# EAGLE board LPC218devboard (EAGLE 7.7.0)
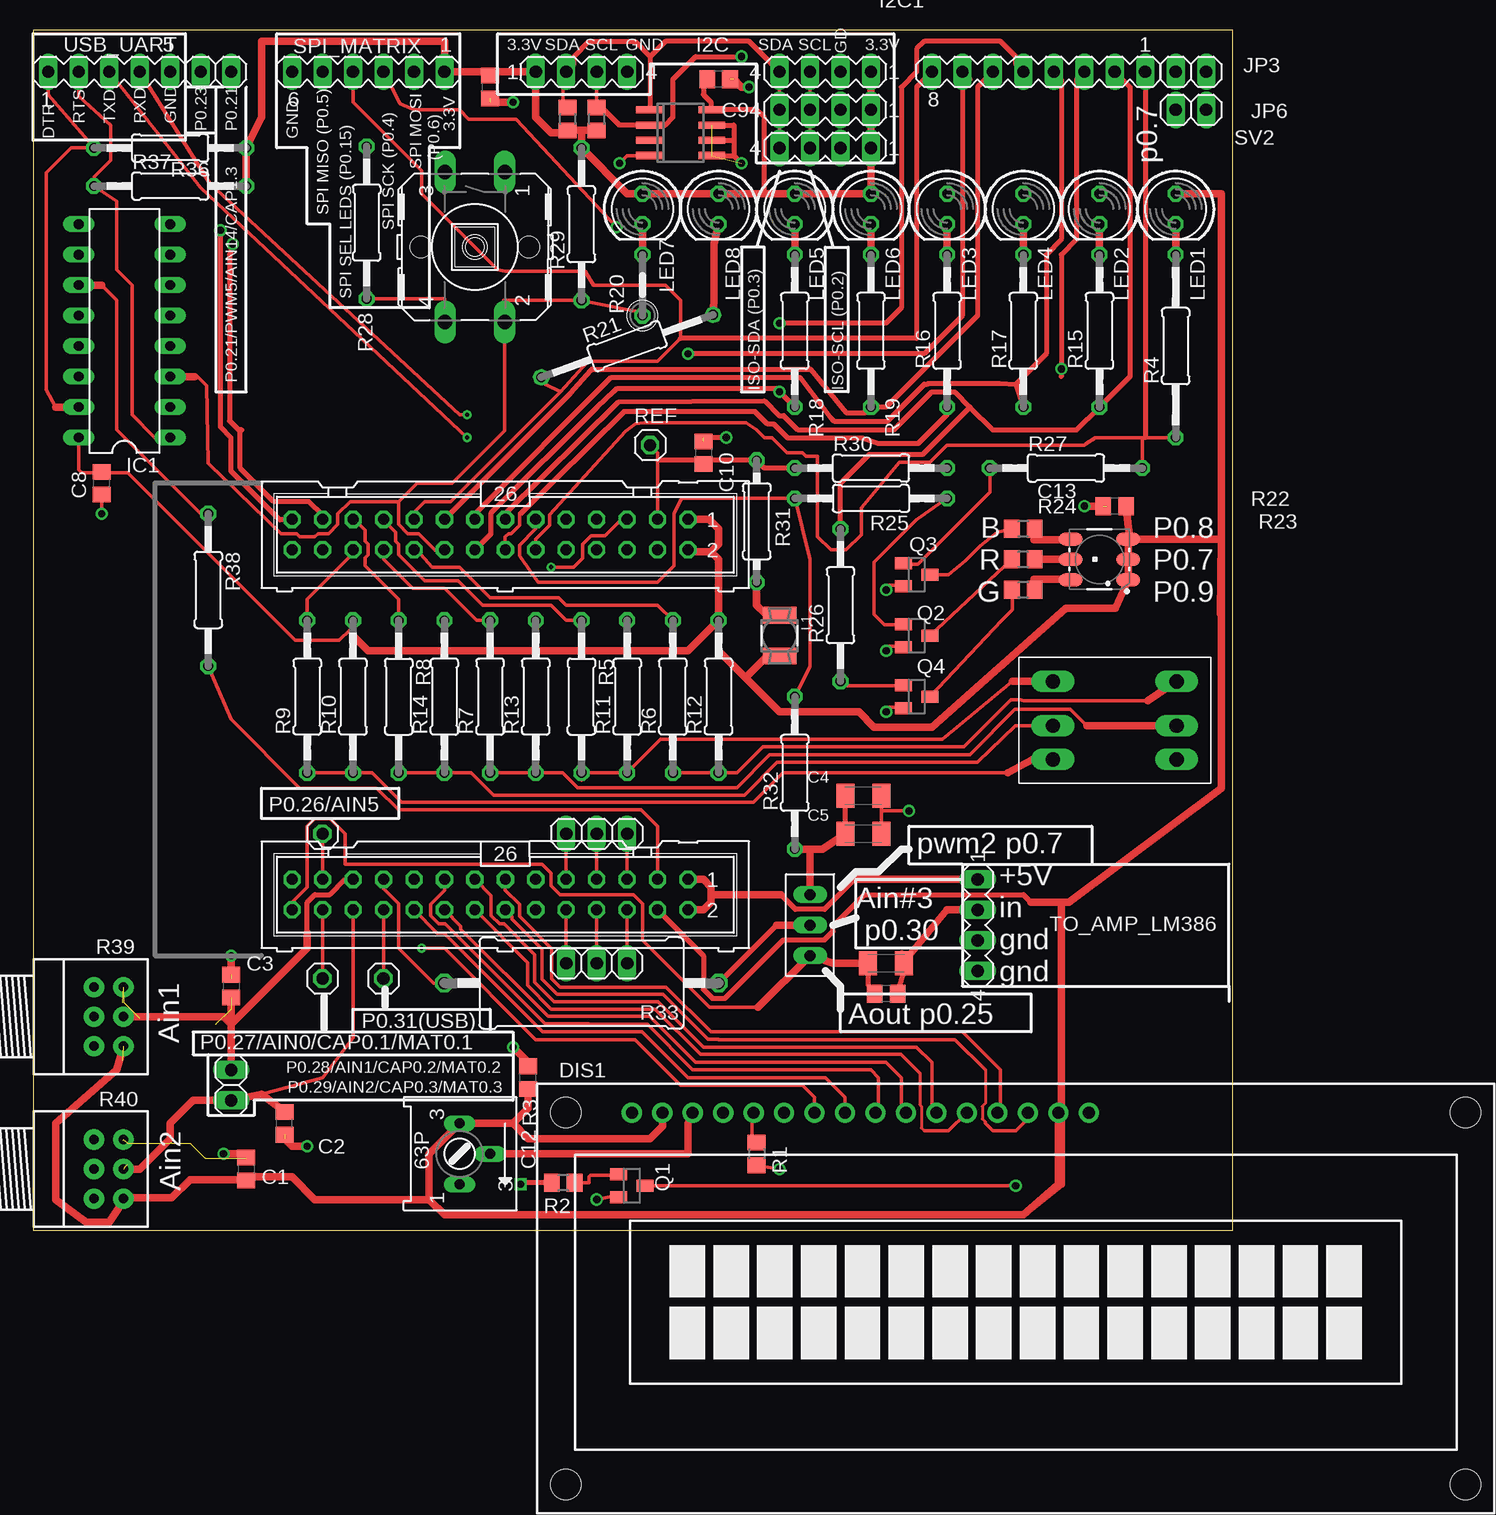
[diagram p0: board, top side]
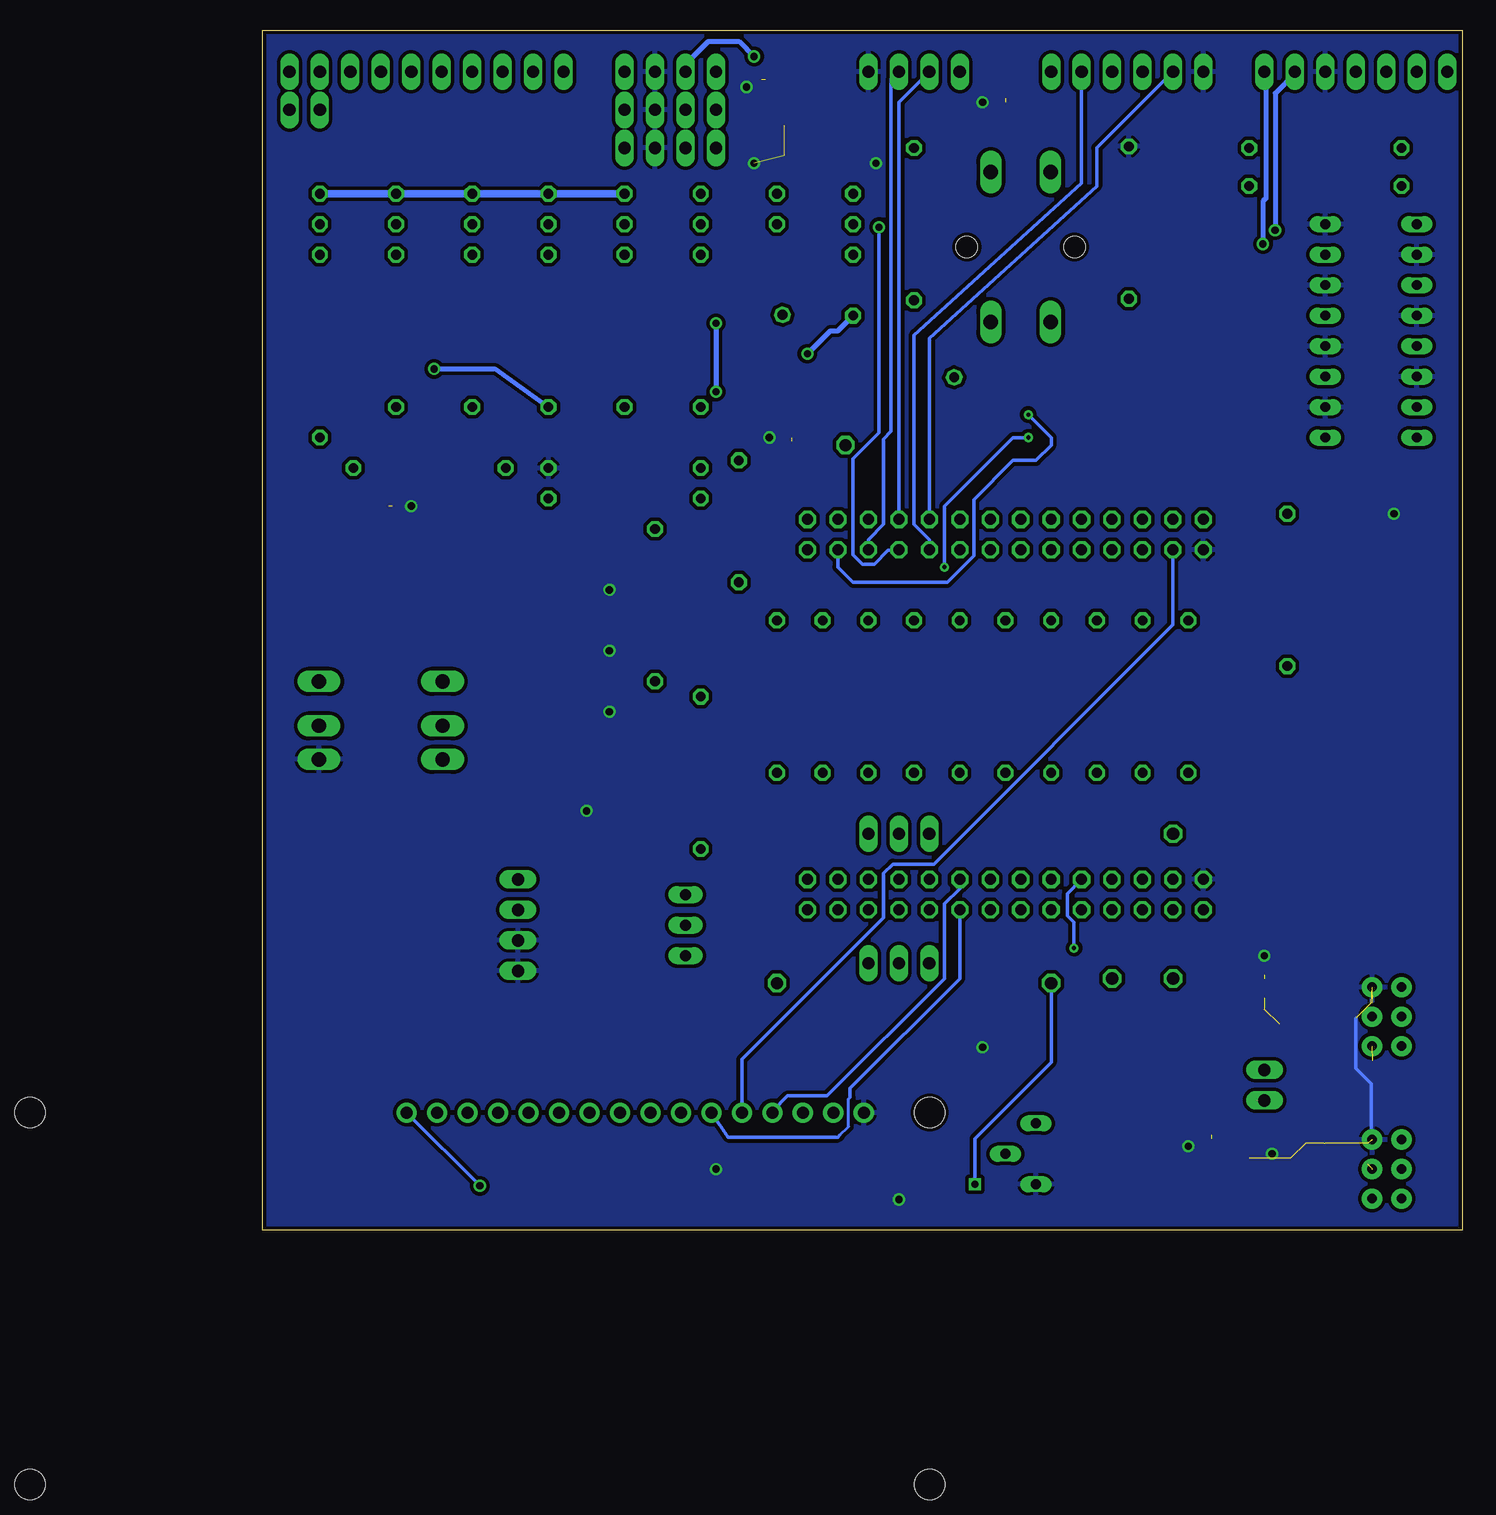
[diagram p1: board, bottom side, seen from below]

Size 100 x 100 mm. Coordinates in mm from the lower left corner, seen from the top.
Outline: 0,0 100,0 100,100 0,100 0,0
Copper layers (1*16): Top 0.035mm / dielectric 1.5mm / Bottom 0.035mm
Design rules "default *": minimum track width 12mil, minimum drill 24mil, track to track 12mil, track to pad 12mil, pad to pad 0.5mm, via to via 0.5mm, smd to smd 8mil, copper to edge 12mil, drill to drill 8mil, minimum pad ring 10mil, minimum via ring 8mil, stop-mask expansion 4mil, vias tented up to drill 0mil, thermal gap 10mil

## Footprints (pad centres in the part's own frame; a part is rotated, then mirrored left to right if it is on the bottom)
C0805 = smd 1.3 x 1.5: 1 -0.95,0; 2 0.95,0
C1206K = smd 1.5 x 2: 1 -1.5,0; 2 1.5,0
LED-TRICOLOR-5050 = smd 2 x 1.1: 1 -2.4,1.7; 2 -2.4,0; 3 -2.4,-1.7; 4 2.4,-1.7; 5 2.4,0; 6 2.4,1.7
TUXGR_16X2_R2 = drill 1 pad 1.676: 1 -32,15.5; 2 -29.46,15.5; 3 -26.92,15.5; 4 -24.38,15.5; 5 -21.84,15.5; 6 -19.3,15.5; 7 -16.76,15.5; 8 -14.22,15.5; 9 -11.68,15.5; 10 -9.14,15.5; 11 -6.6,15.5; 12 -4.06,15.5; 13 -1.52,15.5; 14 1.02,15.5; 15 3.56,15.5; 16 6.1,15.5 | hole 2.5: -37.5,-15.5; 37.5,-15.5; -37.5,15.5; 37.5,15.5
MA04-1 = drill 1.016 long: 1 -3.81,0; 2 -1.27,0; 3 1.27,0; 4 3.81,0
DIL16 = drill 0.813 long: 1 -8.89,-3.81; 2 -6.35,-3.81; 3 -3.81,-3.81; 4 -1.27,-3.81; 5 1.27,-3.81; 6 3.81,-3.81; 7 6.35,-3.81; 8 8.89,-3.81; 9 8.89,3.81; 10 6.35,3.81; 11 3.81,3.81; 12 1.27,3.81; 13 -1.27,3.81; 14 -3.81,3.81; 15 -6.35,3.81; 16 -8.89,3.81
SO8 = smd 0.6 x 2.2: 1 -1.905,-2.6; 2 -0.635,-2.6; 3 0.635,-2.6; 4 1.905,-2.6; 5 1.905,2.6; 6 0.635,2.6; 7 -0.635,2.6; 8 -1.905,2.6
1X02 = drill 1.016 long: 1 -1.27,0; 2 1.27,0
1X03 = drill 1.016 long: 1 -2.54,0; 2 0,0; 3 2.54,0
MS50 = smd 2.8 x 1.4: 1 0,-1.7; 2 0,1.7
LED5MM = drill 0.813 octagon: A -1.27,0; K 1.27,0
1X01 = drill 1.016 octagon: 1 0,0
SOT23 = smd 1 x 1.4: 1 -0.95,-1.1; 2 0.95,-1.1; 3 0,1.1
R0805 = smd 1.3 x 1.5: 1 -0.95,0; 2 0.95,0
S63P = drill 0.813 long: A 2.54,0; E -2.54,0; S 0,2.54
0207/15 = drill 0.813 octagon: 1 -7.62,0; 2 7.62,0
0207/12 = drill 0.813 octagon: 1 -6.35,0; 2 6.35,0
0207/5V = drill 0.813 octagon: 1 -2.54,0; 2 2.54,0
0207/10 = drill 0.813 octagon: 1 -5.08,0; 2 5.08,0
P0817/22 = drill 1.016 octagon: 1 -11.43,0; 2 11.43,0
RK097G = drill 0.8 pad 1.676: 1-1 -2.46,-1.27; 1-2 0,-1.27; 1-3 2.46,-1.27; 2-1 -2.46,1.19; 2-2 0,1.19; 2-3 2.46,1.19
B3F-40XX = drill 1.194 long: 1 -6.248,2.489; 2 6.248,2.489; 3 -6.248,-2.489; 4 6.248,-2.489 | hole 1.803: 0,-4.496; 0,4.496
MA06-1 = drill 1.016 long: 1 -6.35,0; 2 -3.81,0; 3 -1.27,0; 4 1.27,0; 5 3.81,0; 6 6.35,0
ML26 = drill 0.914 octagon: 1 -15.24,-1.27; 2 -15.24,1.27; 3 -12.7,-1.27; 4 -12.7,1.27; 5 -10.16,-1.27; 6 -10.16,1.27; 7 -7.62,-1.27; 8 -7.62,1.27; 9 -5.08,-1.27; 10 -5.08,1.27; 11 -2.54,-1.27; 12 -2.54,1.27; 13 0,-1.27; 14 0,1.27; 15 2.54,-1.27; 16 2.54,1.27; 17 5.08,-1.27; 18 5.08,1.27; 19 7.62,-1.27; 20 7.62,1.27; 21 10.16,-1.27; 22 10.16,1.27; 23 12.7,-1.27; 24 12.7,1.27; 25 15.24,-1.27; 26 15.24,1.27; 27 17.78,-1.27; 28 17.78,1.27
MA08-1 = drill 1.016 long: 1 -8.89,0; 2 -6.35,0; 3 -3.81,0; 4 -1.27,0; 5 1.27,0; 6 3.81,0; 7 6.35,0; 8 8.89,0
ALPS_SKQ_MDS_PTH = drill 1.2 long: 1 -5.15,2.54; 2 -5.15,-1.16; 3 -5.15,-3.96; 4 5.15,-3.96; 5 5.15,-1.16; 6 5.15,2.54
JP2_ORIG = drill 0.914 long: 1 -2.54,0; 2 0,0; 3 2.54,0
MA05-1 = drill 1.016 long: 1 -5.08,0; 2 -2.54,0; 3 0,0; 4 2.54,0; 5 5.08,0

## Placement (x,y rotation side)
C1  100n  [C0805]  17.78,5.08 270 top
C2  100n  [C0805]  20.95,8.89 90 top
C3  100n  [C0805]  16.51,20.32 270 top
C4  10u  [C1206K]  69.22,36.2 180 top
C5  10u  [C1206K]  69.22,33.02 180 top
C6  100n  [C0805]  71.12,19.68 180 top
C7  10u  [C1206K]  71.12,22.23 180 top
C8  100n  [C0805]  5.71,62.23 90 top
C9  100n  [C0805]  57.15,95.89 180 top
C10  100n  [C0805]  55.88,64.77 270 top
C11  100n  [C0805]  38.1,95.25 270 top
C12  100n  [C0805]  41.27,12.7 90 top
C13  100n  [C0805]  90.17,60.33 180 top
D1  [LED-TRICOLOR-5050]  88.9,55.88 180 top
DIS1  TUXGR_16X2_R2  [TUXGR_16X2_R2]  81.92,-5.71 0 top
I2C  [MA04-1]  45.72,96.52 0 top
I2C1  [MA04-1]  66.04,96.52 180 top
I2C2  [MA04-1]  66.04,93.34 180 top
I2C3  [MA04-1]  66.04,90.17 180 top
IC1  4503N  [DIL16]  7.62,74.93 90 top
IC2  LM75A  [SO8]  53.98,91.44 270 top
JP1  [1X02]  16.51,12.06 270 top
JP2  [1X02]  15.24,96.52 180 top
JP3  [1X02]  96.52,96.52 0 top
JP4  [1X03]  46.99,33.02 0 top
JP5  [1X03]  46.99,22.23 180 top
JP6  [1X02]  96.52,93.34 0 top
L1  [MS50]  62.23,49.53 180 top
LED1  [LED5MM]  95.25,85.09 270 top
LED2  [LED5MM]  88.9,85.09 270 top
LED3  [LED5MM]  76.2,85.09 270 top
LED4  [LED5MM]  82.55,85.09 270 top
LED5  [LED5MM]  63.5,85.09 270 top
LED6  [LED5MM]  69.85,85.09 270 top
LED7  [LED5MM]  50.8,85.09 270 top
LED8  [LED5MM]  57.15,85.09 270 top
P0.26/AIN5  [1X01]  24.13,33.02 0 top
P0.27/AIN0/CAP0.1/MAT0.1  [1X01]  24.13,20.95 0 top
P0.31(USB)  [1X01]  29.21,20.95 0 top
Q1  BC848ASMD  [SOT23]  49.91,3.68 270 top
Q2  BC848ASMD  [SOT23]  73.66,49.53 270 top
Q3  BC848ASMD  [SOT23]  73.66,54.61 270 top
Q4  BC848ASMD  [SOT23]  73.66,44.45 270 top
R1  3K  [R0805]  60.33,6.35 270 top
R2  3K  [R0805]  44.2,3.94 180 top
R3  [S63P]  35.56,6.35 270 top
R4  1K  [0207/15]  95.25,73.66 90 top
R5  270  [0207/12]  45.72,44.45 270 top
R6  270  [0207/12]  53.34,44.45 90 top
R7  270  [0207/12]  38.1,44.45 90 top
R8  270  [0207/12]  30.48,44.45 270 top
R9  270  [0207/12]  22.86,44.45 90 top
R10  10k  [0207/12]  26.67,44.45 90 top
R11  10k  [0207/12]  49.53,44.45 90 top
R12  10k  [0207/12]  57.15,44.45 90 top
R13  10k  [0207/12]  41.91,44.45 90 top
R14  10k  [0207/12]  34.29,44.45 90 top
R15  1K  [0207/12]  88.9,74.93 90 top
R16  1K  [0207/12]  76.2,74.93 90 top
R17  1K  [0207/12]  82.55,74.93 90 top
R18  1K  [0207/12]  63.5,74.93 90 top
R19  1K  [0207/12]  69.85,74.93 90 top
R20  1K  [0207/5V]  50.8,78.74 90 top
R21  1K  [0207/15]  49.53,73.66 20 top
R22  1K  [R0805]  82.55,55.88 180 top
R23  1K  [R0805]  82.55,53.34 180 top
R24  1K  [R0805]  82.55,58.42 180 top
R25  10k  [0207/12]  69.85,60.96 180 top
R26  10k  [0207/12]  67.31,52.07 90 top
R27  10k  [0207/12]  86.11,63.5 0 top
R28  270  [0207/12]  27.81,83.95 90 top
R29  10K  [0207/12]  45.72,83.82 90 top
R30  3K  [0207/12]  69.85,63.5 0 top
R31  1.5K  [0207/10]  60.33,59.05 270 top
R32  3K  [0207/12]  63.5,38.1 90 top
R33  180  [P0817/22]  45.72,20.57 180 top
R34  3K  [R0805]  44.58,92.58 90 top
R35  3K  [R0805]  46.99,92.58 90 top
R36  10k  [0207/12]  11.43,90.17 0 top
R37  10k  [0207/12]  11.43,87 0 top
R38  10k  [0207/12]  14.61,53.34 270 top
R39  [RK097G]  6.35,17.78 270 top
R40  [RK097G]  6.35,5.08 270 top
REF  [1X01]  51.44,65.41 0 top
S1  [B3F-40XX]  36.83,81.92 270 top
SPI_MATRIX  [MA06-1]  27.94,96.52 180 top
SV1  [ML26]  39.37,57.94 180 top
SV2  [MA08-1]  83.82,96.52 180 top
SW1  [ALPS_SKQ_MDS_PTH]  90.17,43.18 0 top
TO_AMP_LM386  [MA04-1]  78.74,25.4 270 top
U$1  LPC2148_BOT  [ML26]  39.37,27.94 180 top
U$2  JP2E_ORIGJP2_ORIG  [JP2_ORIG]  64.77,25.4 90 top
USB_UART  [MA05-1]  6.35,96.52 0 top

## Library data of the parts
C1-C13 R1 R2 R4-R38 = rcl
D1 = LED-RGB; PROD_ID: DIO-10298
DIS1 = display-lcd; OC_FARNELL: unknown; OC_NEWARK: unknown
I2C I2C1-I2C3 SPI_MATRIX SV2 TO_AMP_LM386 USB_UART = con-lstb; OC_FARNELL: unknown; OC_NEWARK: unknown
IC1 = 45xx
IC2 = LM75A
JP1-JP6 P0.26/AIN5 P0.27/AIN0/CAP0.1/MAT0.1 P0.31(USB) REF = pinhead
L1 = inductor-neosid; OC_FARNELL: unknown; OC_NEWARK: unknown
LED1-LED8 = led
Q1-Q4 = transistor-npn
R3 = pot
R39 R40 = poti_RK097G
S1 = switch-omron; MF: OMRON COMPONENTS USA; MPN: B3F-4000; OC_FARNELL: 176434; OC_NEWARK: 36K3105
SV1 U$1 = con_LPC2148
SW1 = ALPS_SKQ_MDS
U$2 = Switch Aliexpress 2

## Nets
+3V3: C1.2 C8.2 C9.2 C11.1 C12.1 C13.1 D1.1 D1.2 D1.3 DIS1.2 DIS1.15 I2C1.1 I2C2.1 I2C3.1 I2C.1 IC1.16 IC2.8 L1.2 LED1.A LED2.A LED3.A LED4.A LED5.A LED6.A LED7.A LED8.A R3.E R10.2 R11.2 R12.2 R13.2 R14.2 R29.2 R34.1 R35.1 R36.2 R37.2 R39.2-3 R40.2-3 SPI_MATRIX.1 SV1.1 SV1.2 U$1.4
+5V: TO_AMP_LM386.1 U$1.1 U$1.2
GND: C1.1 C2.1 C3.1 C4.1 C5.1 C8.1 C9.1 C10.1 C11.2 C13.2 DIS1.1 I2C1.2 I2C2.2 I2C3.2 I2C.4 IC1.2 IC1.4 IC1.6 IC1.8 IC1.10 IC1.12 IC1.14 IC2.4 IC2.5 IC2.6 IC2.7 Q1.2 Q2.2 Q3.2 Q4.2 R1.2 R3.A R28.2 R30.2 R39.2-1 R40.2-1 SPI_MATRIX.6 SV1.28 SW1.4 TO_AMP_LM386.3 TO_AMP_LM386.4 U$1.27 USB_UART.5
N$1: IC1.1 R37.1 USB_UART.2
N$2: DIS1.7 U$1.19
N$3: DIS1.8 U$1.20
N$4: DIS1.9 U$1.17
N$5: DIS1.10 U$1.18
N$6: DIS1.11 U$1.15
N$7: DIS1.12 U$1.16
N$8: DIS1.13 U$1.13
N$9: DIS1.14 U$1.14
N$10: R38.2 U$1.3
N$11: DIS1.4 U$1.11
N$12: DIS1.5 R1.1 SV1.26
N$13: DIS1.6 U$1.12
N$14: R2.2 R33.2 U$1.21
N$15: Q1.1 R2.1
N$16: DIS1.16 Q1.3
N$17: DIS1.3 R3.S
N$18: R9.2 SV1.24
N$19: R7.2 SV1.22
N$20: R6.2 SV1.20
N$21: R5.1 SV1.21
N$22: R8.1 SV1.23
N$23: R6.1 R12.1 SW1.6
N$24: R7.1 R13.1 SW1.5
N$25: R5.2 R11.1 SW1.1
N$26: R8.2 R14.1 SW1.2
N$27: R9.1 R10.1 SW1.3
N$28: LED1.K R4.2
N$29: LED2.K R15.2
N$30: R28.1 S1.4
N$31: R15.1 R26.2 SV1.13 SV2.2
N$33: R4.1 R27.2 SV1.12 SV2.1
N$34: Q3.3 R24.2
N$35: LED3.K R16.2
N$36: LED4.K R17.2
N$37: R16.1 SV1.14 SV2.3
N$38: R17.1 SV1.15 SV2.4
N$41: Q4.3 R23.2
N$42: LED5.K R18.2
N$43: LED6.K R19.2
N$46: R19.1 SV1.17 SV2.6
N$47: R18.1 SV1.16 SV2.5
N$48: Q2.3 R22.2
N$49: LED7.K R20.2
N$50: LED8.K R21.2
N$52: L1.1 R31.2
N$54: IC1.3 R20.1 R29.1 S1.2 SV1.18 SV2.7
N$55: Q2.1 R25.1
N$56: D1.5 R22.1
N$57: D1.6 R23.1
N$58: D1.4 R24.1
N$59: R25.2 R32.2 SV1.11
N$60: Q3.1 R27.1
N$61: Q4.1 R26.1
N$62: SV1.4 USB_UART.4
N$63: SV1.5 USB_UART.3
N$66: C3.2 JP1.1 R39.2-2 U$1.23
N$67: R33.1 U$2.2
N$68: C2.2 JP1.2 R40.2-2 U$1.24
N$69: C6.1 C7.1 TO_AMP_LM386.2
N$70: C4.2 C5.2 R32.1 U$2.3
N$71: IC1.11 R38.1
N$72: C6.2 C7.2 U$1.28 U$2.1
N$73: IC1.15 R36.1 USB_UART.1
N$74: C10.2 R30.1 R31.1 REF.1 SV1.3
N$75: JP4.1 U$1.9
N$76: JP4.2 U$1.7
N$77: JP4.3 U$1.5
N$78: JP5.3 U$1.10
N$79: JP5.2 U$1.8
N$80: JP5.1 U$1.6
N$81: P0.27/AIN0/CAP0.1/MAT0.1.1 U$1.26
N$82: P0.31(USB).1 U$1.22
N$83: P0.26/AIN5.1 U$1.25
P0.21: JP2.1 SV1.25
P0.23: JP2.2 SV1.27
SCL: I2C1.3 I2C2.3 I2C3.3 I2C.3 IC2.2 R35.2 SV1.6
SDA: I2C1.4 I2C2.4 I2C3.4 I2C.2 IC2.1 R34.2 SV1.7
SPI_MISO: SPI_MATRIX.5 SV1.9
SPI_MOSI: SPI_MATRIX.2 SV1.10
SPI_SCK: SPI_MATRIX.3 SV1.8
SPI_SEL: R21.1 SPI_MATRIX.4 SV1.19 SV2.8

## Tracks (layer width: path | path; a pad name or v marks a point on that pad's centre or on a via)
+3V3  (1 unrouted)
  Top 0.305: 56.52,93.34 56.26,93.34 | 91.31,55.88 D1.2 | 99.06,57.58 98.81,51.31 99.06,51.31 | DIS1.15 | IC1.16 3.81,63.37 4.06,63.12 5.71,63.12 C8.2 5.84,63.12 7.87,63.12 21.84,49.15 25.53,49.15 26.42,50.04 26.67,50.04 | 45.85,91.63 45.85,91.69 45.72,91.44 | 17.78,4.19 C1.2 | 7.62,2.67 R40.2-3 7.49,2.67
  Top 0.406: 83.2,27.3 82.57,27.94 69.32,27.94 66.7,25.32 66.7,24.89 65.99,24.18 62.55,24.18 57.68,19.3 56.62,19.3 55.88,20.05 55.88,22.86 U$1.4 | C9.2 55.88,95.25 55.88,94.61 56.52,93.98 56.52,93.34 IC2.8 60.33,93.34 60.96,92.71 60.96,86.36
  Top 0.61: R10.2 26.67,50.04 26.67,49.53 27.94,48.26 34.29,48.26 | 34.29,48.26 41.91,48.26 | 41.91,48.26 49.53,48.26 | 49.53,48.26 54.61,48.26 R12.2 | R11.2 49.53,48.26 | R13.2 41.91,48.26 | R14.2 34.29,48.26 | 45.72,91.44 R29.2 49.53,86.36 LED7.A LED8.A 60.96,86.36 LED5.A LED6.A I2C3.1 I2C2.1 I2C1.1 | R35.1 45.85,91.63 R34.1 44.38,91.44 43.18,91.44 41.91,92.71 I2C.1 38.1,96.52 | 91.44,57.58 D1.3 D1.2 D1.1 90.21,51.82 86.11,51.82 74.93,41.91 70.1,41.91 68.83,43.18 62.23,43.18 59.37,46.04 | 91.44,57.58 99.06,57.58 | 99.06,57.58 98.98,51.36 | LED1.A 99.06,86.36 99.06,57.58 | 99.06,57.58 99.06,51.31 99.06,36.83 86.36,27.3 85.72,27.3 | 85.72,27.3 85.72,3.81 82.55,1.27 | 82.55,1.27 85.47,3.81 DIS1.15 | 82.55,1.27 34.29,1.27 33.02,2.54 | 33.02,2.54 33.02,6.35 R3.E 40.01,8.89 | SV1.1 56.36,59.21 57.15,58.42 57.15,57.15 56.52,56.52 | 56.52,56.52 54.77,56.52 SV1.2 | R12.2 57.15,55.88 56.52,56.52 | 38.1,96.52 SPI_MATRIX.1 34.29,99.06 19.05,99.06 19.05,92.71 R36.2 R37.2 | DIS1.2 52.45,8.64 51.44,7.62 41.27,7.62 40.01,8.89 | 83.2,27.3 85.72,27.3 | R12.2 57.15,48.26 59.37,46.04 | 17.78,4.19 13.08,4.19 11.56,2.67 7.62,2.67 | 33.02,2.54 23.5,2.54 21.59,4.45 17.78,4.45 C1.2 | R40.2-3 7.62,2.54 6.35,0.64 4.45,0.64 1.91,2.54 1.91,8.89 6.99,13.34 R39.2-3 | L1.2 61.16,47.83 59.37,46.04 | C11.1 38.1,96.52 | C12.1 41.27,10.16 40.01,8.89 | C13.1 91.44,57.58
  Bottom 0.61: LED1.A LED2.A LED4.A LED6.A LED3.A
+5V
  Top 0.406: 68.47,29.21 65.99,26.72 63.55,26.72 62.34,27.94
  Top 0.61: U$1.2 55.88,26.67 56.52,27.3 56.52,27.94 | 56.52,27.94 56.52,28.57 55.88,29.21 U$1.1 | TO_AMP_LM386.1 68.47,29.21 | 62.34,27.94 56.52,27.94
GND  (via drill 0.6)  (21 unrouted)
  Top 0.305: 70.74,34.92 70.74,33.66 C5.1 | 70.74,34.92 70.74,36.2 C4.1 | v46.99,2.54 48.26,2.79 48.77,2.79 Q1.2 | v71.12,43.18 71.12,43.43 71.25,43.56 72.52,43.56 Q4.2 | v71.12,48.26 71.12,48.51 71.25,48.64 72.52,48.64 Q2.2 | v71.12,53.34 71.12,53.59 71.25,53.72 72.52,53.72 Q3.2 | v62.23,5.08 R1.2 | v5.71,59.69 C8.1 | IC2.4 49.53,89.53 v48.9,88.9 | v73.03,34.92 70.74,34.92 | 17.78,5.97 C1.1
  Top 0.406: v57.78,66.04 55.88,66.04
  Top 0.61: v59.69,95.25 59.05,95.25 58.42,95.89 | v40.01,93.98 38.1,93.98 | v40.01,15.24 41.27,13.97 | v87.63,60.33 89.53,60.33 | v16.51,22.86 16.51,20.95 | v22.86,6.99 21.59,6.99 20.95,7.62 | v15.88,6.35 17.78,6.35
  Bottom 0.305: 8.89,17.65 8.89,13.46 7.62,12.19 7.62,7.62 R40.2-1
  other vias: 59.05,88.9
  pour Bottom: -0.13,101.35 100.08,101.47 100.33,0 -0.64,-0.64
N$1
  Top 0.305: R37.1 5.59,87.12 | USB_UART.2 3.81,94.49 6.48,92.08 6.48,89.15 5.08,87.76 R37.1 | IC1.1 10.16,66.04 8.26,67.94 8.26,78.74 6.99,80.01 6.99,85.72 R37.1
N$2  (via drill 0.35)
  Top 0.305: DIS1.7 65.16,11.04 64.14,12.06 53.98,12.06 50.16,15.88 41.91,15.88 34.29,23.5 v32.38,23.5
  Bottom 0.305: v32.38,23.5 32.38,25.65 32.92,26.19 32.92,28.04 U$1.19
N$3
  Top 0.305: DIS1.8 67.69,11.04 66.04,12.7 54.61,12.7 50.77,16.54 42.47,16.54 34.27,24.74 33.68,24.74 U$1.20
N$4
  Top 0.305: U$1.17 34.29,28.32 33.12,27.15 33.12,26.19 33.81,25.5 34.37,25.5 42.67,17.2 46.3,17.2 46.35,17.14 51.21,17.14 54.99,13.36 55.85,13.36 55.88,13.34 69.85,13.34 70.48,12.7 70.48,10.04 DIS1.9
N$5
  Top 0.305: U$1.18 35.66,25.3 35.66,25.07 42.93,17.8 51.41,17.8 55.24,13.97 71.12,13.97 72.39,12.7 72.39,10.17 DIS1.10
N$6
  Top 0.305: DIS1.11 74.93,10.17 74.93,13.97 73.66,15.24 55.88,15.24 52.09,19.02 43.81,19.02 43.44,19.02 41.82,20.64 41.82,22.95 39.27,25.5 38.89,25.5 38.2,26.19 38.2,27.84 U$1.15
N$7
  Top 0.254: 73.91,13.08 73.91,10.44 74.05,10.31 74.05,8.51 74.3,8.26
  Top 0.305: U$1.16 41.21,22.29 41.21,20.38 43.18,18.41 43.19,18.41 | 43.19,18.41 | 43.19,18.41 51.84,18.41 55.63,14.63 72.36,14.63 73.91,13.08 | 74.3,8.26 76.33,8.26 DIS1.12
N$8
  Top 0.305: U$1.13 39.37,28.32 40.54,27.15 40.54,26.14 43.23,23.44 43.23,20.96 43.95,20.24 52.78,20.24 56.52,16.51 77.47,16.51 80.64,13.34 80.64,10.04 DIS1.13
N$9
  Top 0.254: 79.38,13.34 79.38,10.56 79.12,10.31 79.12,9.26 79.38,9.01 79.38,8.89
  Top 0.305: DIS1.14 82.94,9.28 81.92,8.26 80.01,8.26 79.38,8.89 | U$1.14 39.93,26.11 39.93,25.88 42.43,23.38 42.43,20.89 43.69,19.63 52.53,19.63 56.26,15.9 57.12,15.9 57.15,15.88 76.83,15.88 79.38,13.34
N$10
  Top 0.305: R38.2 16.51,42.55 22.23,36.83 28.66,36.83 30.46,35.03 50.7,35.03 52.07,33.66 U$1.3
N$11
  Bottom 0.305: U$1.11 41.91,28.45 43.18,27.18 43.18,20.95 52.96,11.18 56.26,11.18 57.53,9.91 DIS1.4
N$12
  Top 0.305: R1.1 59.94,7.62 59.94,9.65 DIS1.5
  Bottom 0.305: SV1.26 24.13,50.42 44.07,30.48 47.5,30.48 48.26,29.72 48.26,26.04 60.07,14.22 60.07,9.91 DIS1.5
N$13
  Bottom 0.254: 51.93,7.88 51.19,8.62 51.19,10.92 51.05,11.05
  Bottom 0.305: U$1.12 41.91,20.95 51.05,11.81 51.05,11.05 | DIS1.6 61.21,7.75 52.06,7.75 51.93,7.88
N$14  (via drill 0.6)
  Top 0.305: U$1.21 29.21,28.45 30.48,27.18 30.48,23.5 33.4,20.57 R33.2
  Top 0.406: R2.2 40.64,3.94 v40.64,3.81
  Bottom 0.305: R33.2 34.29,13.97 40.64,7.62 v40.64,3.81
N$15
  Top 0.305: Q1.1 48.77,4.57 46.48,4.57 46.35,4.45 46.35,3.94 R2.1
N$16  (via drill 0.61)
  Top 0.305: v81.92,3.68 Q1.3
  Bottom 0.305: v81.92,3.68 DIS1.16
N$17
  Top 0.61: R3.S 54.61,6.35 54.61,8.9 DIS1.3
N$18
  Top 0.305: R9.2 22.86,52.58 26.67,56.39 SV1.24
N$19
  Top 0.305: R7.2 36.96,50.8 34.29,53.47 31.62,53.47 29.21,55.88 SV1.22
N$20
  Top 0.305: R6.2 52.07,52.07 44.45,52.07 43.81,52.7 38.1,52.7 35.56,55.24 33.27,55.24 32,56.64 31.75,56.64 SV1.20
N$21
  Top 0.305: R5.1 44.45,50.8 43.18,52.07 37.47,52.07 35.43,54.1 32.64,54.1 30.48,56.26 30.48,57.15 30.23,57.4 30.23,58.17 29.21,59.18 SV1.21
N$22
  Top 0.305: R8.1 30.48,52.58 27.69,55.37 27.69,56.01 27.94,56.26 27.94,57.15 27.69,57.4 27.69,58.29 26.67,59.31 SV1.23
N$23
  Top 0.305: R6.1 R12.1 58.67,38.1 60.83,40.26 77.6,40.26 81.53,44.2 82.33,44.2 82.54,44.11 92.95,44.11
  Top 0.61: 92.95,44.11 SW1.6
N$24
  Top 0.305: 87.84,42.02 86.48,43.38 81.86,43.38 78.11,39.62 61.38,39.62 58.67,36.85 45.38,36.85 44.14,38.1 R13.1 R7.1
  Top 0.61: SW1.5 87.84,42.02
N$25
  Top 0.305: 81.66,45.72 75.82,40.89 52.32,40.89 R11.1 46.35,38.1 46.04,37.78 | 46.04,37.78 45.72,37.47 | 46.04,37.78 R5.2
  Top 0.61: SW1.1 81.66,45.72
N$26
  Top 0.305: R8.2 R14.1 36.52,38.1 38.37,36.25 59.31,36.25 62.02,38.99 78.74,38.99 81.88,42.01 83.26,42.01 SW1.2
N$27
  Top 0.305: SW1.3 83.33,39.22 | 81.28,38.1 62.53,38.1 60.07,35.64 30.71,35.64 28.25,38.1 R10.1 R9.1
  Top 0.61: 83.33,39.22 81.28,38.1
N$28
  Top 0.61: LED1.K R4.2
N$29
  Top 0.61: LED2.K R15.2
N$30
  Top 0.305: R28.1 34.29,77.6 S1.4
N$31
  Top 0.406: SV1.13 39.37,59.69 48.82,69.01 60.96,69.09 62.18,67.87 62.56,67.87 63.73,66.7 71.78,66.7 74.93,69.85 76.83,69.85 78.11,68.58 | 78.11,68.58 80.01,66.67 87,66.67 R15.1 91.44,71.12 91.44,95.25 SV2.2 | R26.2 67.31,62.23 69.72,64.64 74.17,64.64 78.11,68.58
N$33
  Top 0.305: 92.46,66.04 R27.2 | R4.1 92.71,66.04 92.46,66.04 | 92.46,66.04 88.56,66.04 87.78,65.51 87.63,65.41 76.2,65.41 74.78,63.98 72.24,63.98 69.06,60.17 69.06,57.96 67.77,56.67 66.52,56.67 65.41,57.78 65.41,64.46 64.45,64.46 64.14,64.77 62.87,64.77 61.59,66.04 60.96,66.04 60.33,66.67 59.43,67.26 50.93,67.26 50.22,67.18 49.4,66.55 43.08,59.59 43.08,58.73 41.91,57.56 SV1.12
  Top 0.406: SV2.1 92.71,66.04
  Bottom 0.305: 41.91,56.64 SV1.12
N$34
  Top 0.305: Q3.3 76.33,54.61 77.72,55.75 78.99,57.02 80.39,58.17 81.66,58.42 R24.2
N$35
  Top 0.61: LED3.K R16.2
N$36
  Top 0.61: LED4.K R17.2
N$37  (via drill 0.6)
  Top 0.305: SV1.14 39.37,57.78 39.63,58.04 39.85,58.04 40.54,58.73 40.54,59.59 40.64,59.69
  Top 0.406: R16.1 76.2,67.94 73.79,65.53 70.47,65.53 69.14,65.99 62.92,65.99 61.75,67.16 61.24,67.16 60.2,68.2 49.25,68.2 40.64,59.69 | 85.72,71.12 v85.72,71.75 85.72,81.28 87,82.55 87,95.89 SV2.3
  Bottom 0.406: R16.1 80.64,71.75 v85.72,71.75
N$38
  Top 0.406: SV1.15 36.83,59.69 48.16,71.02 63.98,71.02 65.94,68.43 66.57,67.61 66.78,67.41 71.22,67.41 74.3,70.48 74.56,70.48 74.64,70.56 80.57,70.56 81.92,70.48 | 81.92,70.48 R17.1 | SV2.4 85.72,95.89 85.72,82.55 84.45,81.28 84.45,73.03 81.92,70.48
N$40
  Top 0.406: 56.52,92.08 58.42,92.08 58.42,90.81 | 58.42,90.81 58.42,89.53 | 58.42,89.53 59.05,88.9 | 56.52,90.81 58.42,90.81 | 56.52,89.53 58.42,89.53
N$41
  Top 0.305: Q4.3 80.77,50.8 81.66,51.69 81.66,53.34 R23.2
N$42
  Top 0.61: LED5.K R18.2
N$43
  Top 0.61: LED6.K R19.2
N$46
  Top 0.406: SV1.17 44.83,69.75 46.52,71.65 46.59,71.73 64.8,71.73 67.77,68.12 69.39,68.12 R19.1 71.12,68.58 78.74,76.2 78.74,95.25 SV2.6
N$47  (via drill 0.6)
  Top 0.406: SV1.16 38.15,57.99 38.15,59.72 47.02,68.58 48.39,69.85 48.64,70.1 61.98,70.1 v62.23,69.85 R18.1 | SV2.5 81.92,97.16 81.92,97.79 80.64,99.06 74.3,99.06 73.66,98.42 73.66,96.52 72.39,95.25 72.39,76.83 71.12,75.56 v62.23,75.56
  Bottom 0.406: v62.23,75.56 v62.23,69.85
N$48
  Top 0.305: R22.2 Q2.3
N$49
  Top 0.61: LED7.K R20.2
N$50
  Top 0.61: LED8.K 56.77,82.17 56.77,77.47 R21.2
N$52
  Top 0.61: R31.2 60.33,52.07 60.96,51.44 62.23,51.44 L1.1
N$54  (via drill 0.6)
  Top 0.305: R20.1 51.05,76.58 50.16,76.58 46.23,77.34 R29.1 39.37,77.47 S1.2 | IC1.3 11.94,71.25 | 39.24,77.47 S1.2 | SV1.18 34.29,56.64 33.53,56.64 32.13,58.04 31.24,58.04 30.48,58.8 30.48,60.71 | S1.2 39.32,66.62 34.92,62.23 32,62.23 30.48,60.71 | 13.46,71.12 13.72,71.12 14.48,70.36 14.61,63.88 20.7,58.04 21.97,58.04 22.23,57.78 23.5,57.78 23.75,58.04 24.64,58.04 25.4,58.8 25.4,59.69 26.42,60.71 30.48,60.71
  Top 0.406: v54.61,73.03 74.3,73.03 77.47,76.2 77.47,95.25 78.11,95.89 SV2.7
  Top 0.61: 13.46,71.12 IC1.3
  Bottom 0.406: R20.1 52.07,74.93 52.7,74.93 v54.61,73.03
N$55
  Top 0.305: R25.1 73.66,59.18 70.1,55.63 70.1,51.31 70.99,50.42 72.52,50.42 Q2.1
N$56
  Top 0.61: D1.5 R22.1
N$57
  Top 0.305: 83.44,54.23 83.44,53.34 R23.1 | 86.49,54.23 D1.6
  Top 0.61: 86.49,54.23 83.44,54.23
N$58
  Top 0.305: 83.44,57.53 83.44,58.42 R24.1 | 86.49,57.53 D1.4
  Top 0.61: 86.49,57.53 83.44,57.53
N$59
  Top 0.305: R32.2 64.77,46.99 64.77,55.88 R25.2 54.07,60.96 53.44,59.69 53.44,55.35 52.07,53.98 42.11,53.98 40.54,56.19 40.54,57.05 41.91,58.42 SV1.11
N$60
  Top 0.305: R27.1 79.76,61.47 73.79,55.5 72.64,55.5 Q3.1
N$61
  Top 0.305: R26.1 67.69,45.34 72.52,45.34 Q4.1
N$62  (via drill 0.35)
  Top 0.305: v36.2,67.94 35.56,67.94 14.73,87.25 USB_UART.4
  Bottom 0.305: SV1.4 52.07,55.24 50.8,53.98 42.95,53.98 40.74,56.19 40.74,60.86 37.47,64.14 35.56,64.14 34.29,65.41 34.29,66.04 v36.2,67.94
N$63  (via drill 0.35)
  Top 0.305: SV1.5 49.05,59.21 47.68,57.84 46.51,57.84 45.82,57.15 45.82,55.98 45.06,55.22 43.2,55.22 v43.18,55.24 | USB_UART.3 13.97,86.87 v36.2,66.04
  Bottom 0.305: USB_UART.3 6.35,96.14 | v43.18,55.24 43.18,60.33 37.47,66.04 v36.2,66.04
N$66  (2 unrouted)
  Top 0.406: U$1.23 26.04,29.21 24.77,27.94 23.5,27.94 22.86,27.3 22.86,24.77
  Top 0.61: JP1.1 16.51,17.14 | R39.2-2 15.88,17.78 16.19,17.46 16.51,17.14 | 22.86,24.77 22.86,23.5 16.51,17.14 | C3.2 16.51,17.14
N$67
  Top 0.406: 61.98,25.4 R33.1
  Top 0.61: U$2.2 61.98,25.4
N$68  (3 unrouted)
  Top 0.305: U$1.24 26.67,16 24.13,12.7 19.08,11.32 17.14,10.79 JP1.2 | 7.62,5.08 R40.2-2
  Top 0.61: JP1.2 19.08,11.32 C2.2 | 7.62,5.08 8.89,5.08 11.43,7.62 11.43,8.89 13.34,10.79 17.14,10.79
N$69
  Top 0.406: C6.1 72.7,21.91 73.03,22.86 72.39,23.09 C7.1
  Top 0.61: TO_AMP_LM386.2 76.2,26.67 73.03,22.86
N$70
  Top 0.406: C5.2 C4.2
  Top 0.61: 64.77,31.75 65.81,31.75 C5.2 | U$2.3 64.77,31.75 | R32.1 64.77,31.75
N$71
  Top 0.305: R38.1 13.97,59.69 6.99,66.67 6.99,77.47 5.71,78.74
  Top 0.61: 5.71,78.74 IC1.11
N$72
  Top 0.305: 60.45,18.54 56.39,18.54 50.8,24.13 50.8,27.18 50.04,27.94 43.94,27.94 43.18,28.7 43.18,29.72 42.42,30.48 26.04,30.48 26.04,33.02 24.77,34.29 23.5,34.29 22.86,33.66 22.86,28.57 21.59,27.3 U$1.28
  Top 0.406: C7.2 69.62,20.41 C6.2
  Top 0.61: C7.2 66.67,22.23 U$2.1 60.45,18.54
N$73
  Top 0.305: USB_UART.1 1.27,94.61 R36.1 3.17,90.17 1.09,88.09 1.09,70.03 1.91,68.58
  Top 0.61: 1.91,68.58 IC1.15
N$74
  Top 0.305: SV1.3 52.07,64.14 52.07,64.77 REF.1
  Top 0.406: R30.1 60.96,63.5 R31.1 55.88,64.14 | 55.88,64.14 52.07,64.14 | 55.88,64.14 C10.2
N$75
  Top 0.305: JP4.1 U$1.9
N$76
  Top 0.305: JP4.2 U$1.7
N$77
  Top 0.305: JP4.3 U$1.5
N$78
  Top 0.305: JP5.3 U$1.10
N$79
  Top 0.305: JP5.2 U$1.8
N$80
  Top 0.305: JP5.1 U$1.6
N$81
  Top 0.305: U$1.26 P0.27/AIN0/CAP0.1/MAT0.1.1
N$82
  Top 0.305: P0.31(USB).1 U$1.22
N$83
  Top 0.305: U$1.25 P0.26/AIN5.1
P0.21  (via drill 0.6)
  Top 0.406: SV1.25 24.13,59.56 22.99,60.71 20.07,60.71 17.27,63.5 17.27,66.55 17.4,66.67 17.14,66.67 16.38,67.44 16.38,81.28 v16.64,82.17
  Bottom 0.406: v16.64,82.17 16.64,85.72 16.38,85.98 16.38,96.39 JP2.1
P0.23  (via drill 0.6)
  Top 0.406: v15.62,83.31 15.62,66.93 16.51,66.04 16.51,63.25 20.57,59.18 21.59,59.18 SV1.27
  Bottom 0.406: v15.62,83.31 15.62,94.74 13.97,96.39 JP2.2
SCL  (via drill 0.6)
  Top 0.305: I2C3.3 I2C2.3 I2C1.3 | I2C.3 46.99,93.98
  Top 0.406: R35.2 46.99,93.98 48.9,92.08 IC2.2 52.7,92.08 53.34,92.71 53.34,95.89 55.24,97.79 v59.05,97.79
  Bottom 0.305: SV1.6 49.53,57.53 48.26,58.8 48.26,65.91 47.62,66.55 47.62,95.89 I2C.3
  Bottom 0.406: v59.05,97.79 60.33,99.06 62.87,99.06 64.77,97.16 I2C1.3
SDA
  Top 0.305: I2C3.4 I2C2.4 I2C1.4 62.1,96.52 | R34.2 44.58,93.47 44.2,93.47 44.2,96.27 I2C.2 44.45,96.9
  Top 0.406: IC2.1 51.44,93.34 51.44,97.79 | 51.44,97.79 50.16,99.06 46.35,99.06 45.09,97.79 45.09,97.16 I2C.2 | 51.44,97.79 52.7,99.06 59.69,99.06 I2C1.4
  Bottom 0.305: SV1.7 46.99,93.98 I2C.2
SPI_MISO
  Bottom 0.305: SV1.9 44.45,74.3 30.48,87 30.48,90.17 SPI_MATRIX.5
SPI_MOSI
  Bottom 0.305: SV1.10 44.45,57.53 45.72,58.8 45.72,74.55 31.75,87.25 SPI_MATRIX.2
SPI_SCK  (via drill 0.61)
  Top 0.305: v48.64,83.57 40.26,92.58 36.32,92.58 35.56,93.34 31.75,93.34 30.61,93.85 SPI_MATRIX.3
  Bottom 0.305: v48.64,83.57 48.64,66.42 50.8,64.26 50.8,56.26 50.04,55.5 49.02,55.5 47.88,56.64 46.99,56.64 SV1.8
SPI_SEL
  Top 0.305: SV1.19 31.75,59.82 32.64,60.71 34.8,60.71 43.96,69.86 | SPI_MATRIX.4 26.67,93.98 32.38,88.27 32.38,86.36 38.73,80.01 39.37,79.88 46,79.88 46.74,78.72 52.73,78.72 53.98,77.47 53.98,74.3 52.07,72.39 46.32,72.39 46.23,72.3 46.2,72.3 46.04,72.11 45.86,71.93 43.96,69.86 | R21.1 42.7,70.48 43.96,69.86
  Top 0.406: SV2.8 73.66,95.25 73.66,74.3 53.98,74.3

## Text on the board
tPlace: SPI MOSI (P0.6) / SPI SCK (P0.4) / SPI SEL LEDS (P0.15) / SPI MISO (P0.5)
tNames: GD | 3.3V | SDA | SCL | GND | SDA | SCL | 3.3V | RTS | TXD | RXD | GND | P0.23 | P0.21 | 3.3V | DTR | GND | p0.7 | SPI MOSI / (P0.6) | SPI MISO (P0.5) | SPI SCK (P0.4) | SPI SEL LEDS (P0.15) | P0.21/PWM5/AIN14/CAP1.3 | ISO-SDA (P0.3) | ISO-SCL (P0.2) | B / R / G | P0.8 / P0.7 / P0.9 | pwm2 p0.7 | Ain#3 / p0.30 | Ain1 | +5V / in / gnd / gnd | Aout p0.25 | P0.28/AIN1/CAP0.2/MAT0.2 | P0.29/AIN2/CAP0.3/MAT0.3 | Ain2